# Altium PCB BTConnecter.PcbDoc
Units mil, origin at the board's own origin, x right, y up, seen from the top; angles counter-clockwise.
Board outline 1225 x 560 mil, 2 copper layers (Top Layer, Bottom Layer); 32 components, 19 nets, 120 pads, 51 vias.
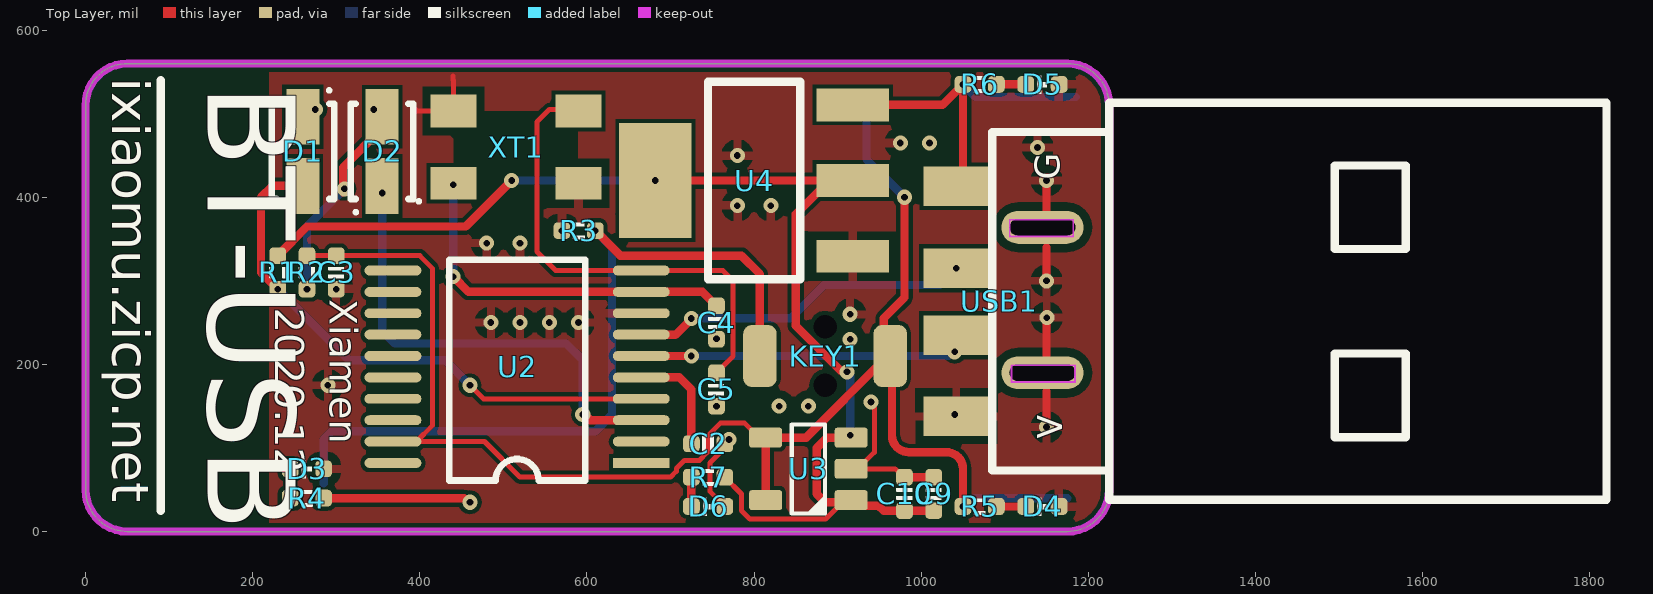
[diagram p0: Top Layer view]
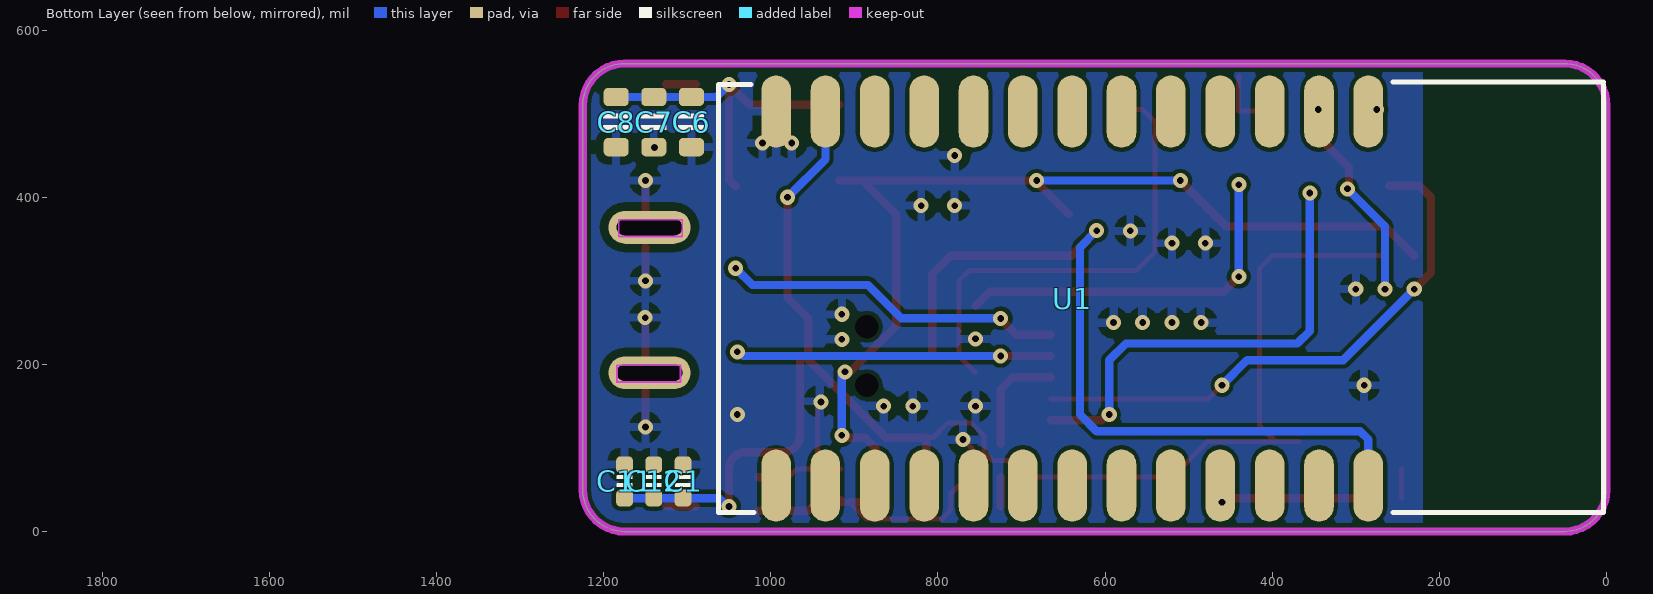
[diagram p1: Bottom Layer view, seen from below]
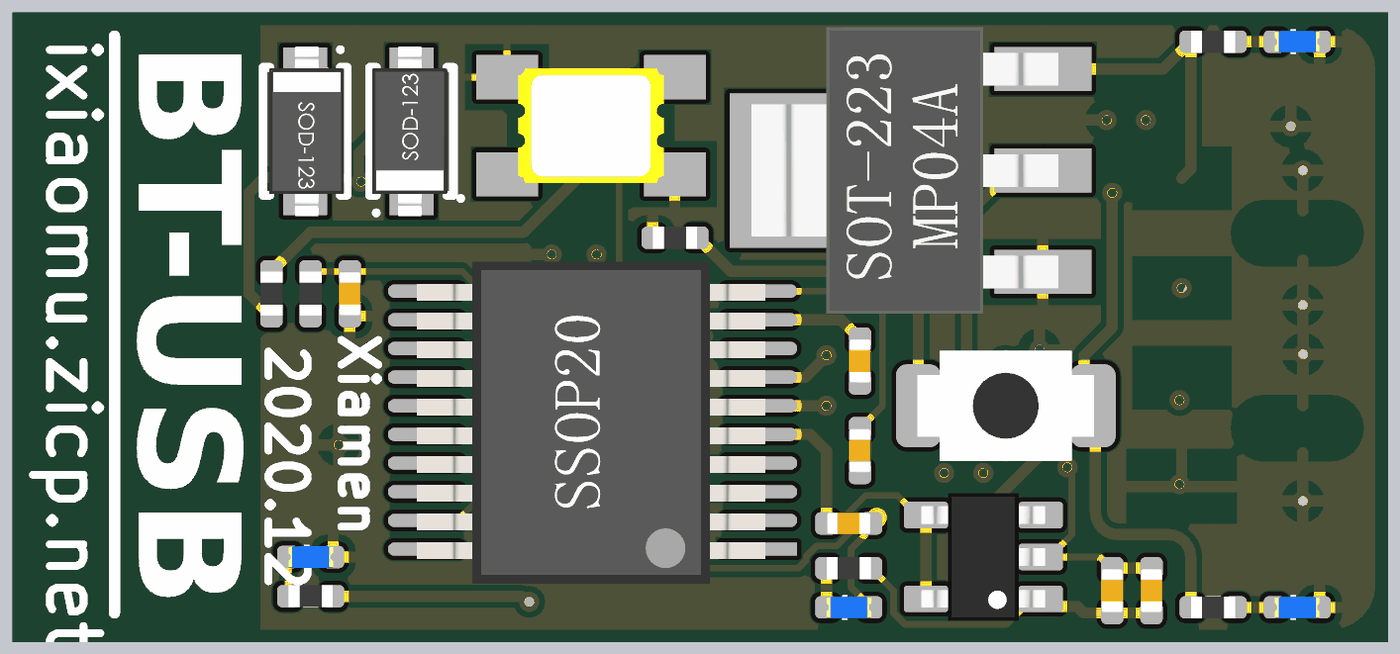
[diagram p2: 3D render of the assembled board from above, using the file's embedded part models]
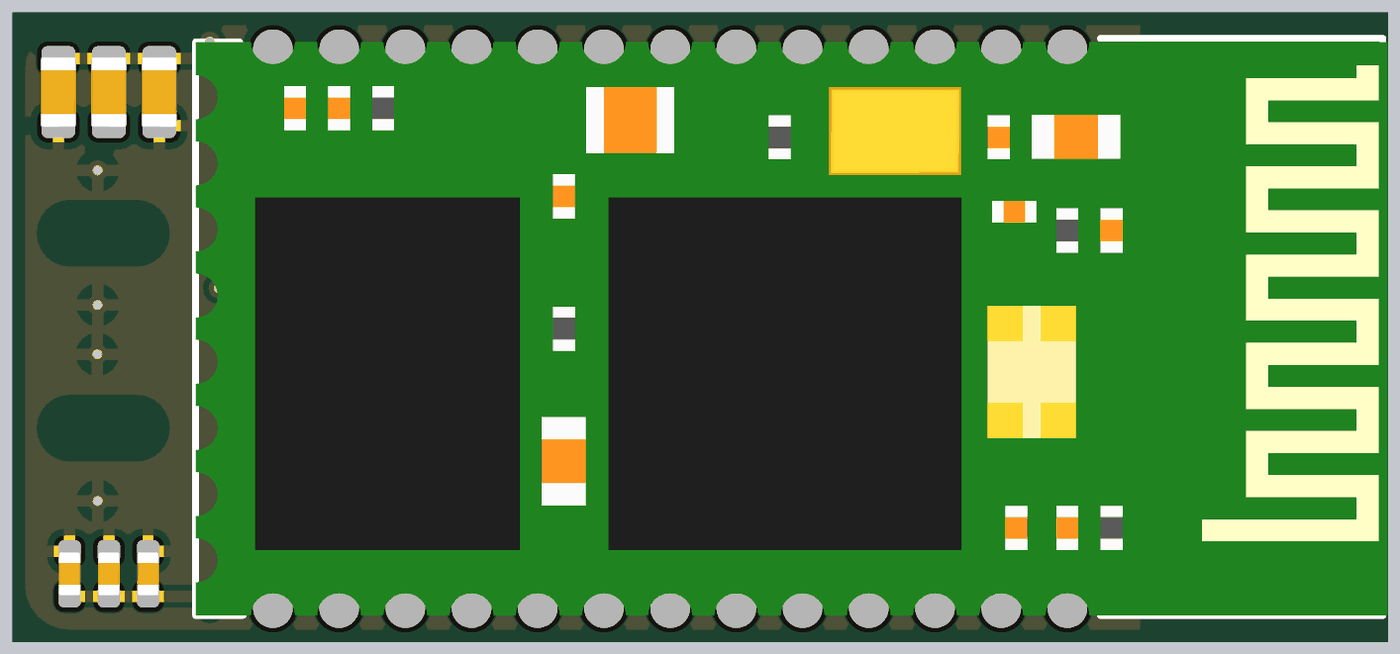
[diagram p3: 3D render of the assembled board from below, using the file's embedded part models]

## Layer stack, top to bottom
Top Solder: solder mask 0.4, Solder Resist, Dk 3.5
Top Layer: signal copper 1.4
Dielectric 1: dielectric 12.6, FR-4, Dk 4.8
Bottom Layer: signal copper 1.4
Bottom Solder: solder mask 0.4, Solder Resist, Dk 3.5

## Board outline
0,50 0,510 cw(c50,510) 50,560 1175,560 cw(c1175,510) 1225,510 1225,50 cw(c1175,50) 1175,0 50,0 cw(c50,50)

## Design rules (kind name [scope] priority, off if disabled: settings)
Clearance [All] p1: gap=5 ignorepadtopadclearanceinfootprint=FALSE
PolygonConnect [All] p1: connectstyle=Relief reliefconductorwidth=10 reliefentries=4 polygonreliefangle="90 Angle" airgapwidth=10
RoutingVias [All] p1: holewidth=28 width=50 viastyle="Through Hole" minholewidth=28 minwidth=50 maxholewidth=28 maxwidth=50
SolderMaskExpansion [All] p1: expansion=4 istentingtop=FALSE
Width [All] p1: maxlimit=25 minlimit=4 preferedwidth=6
30 further rules are at their usual default settings.

## Classes and differential pairs
component class BTConnecter: C1 C2 C3 C4 C5 C6 C7 C8 C9 C10 C11 C12 D1 D2 D3 D4 D5 D6 KEY1 R1 R2 R3 R4 R5 R6 R7 U2 U3 U4 USB1

## Components (designator, comment, footprint, x,y, rotation, side; value= is the part's Value field where it differs from the comment)
C1 "2.2uF" CAP_0402 1105,60 r270 bottom value=0.1u
C2 "0.1uF" CAP_0402 745,105 r180 top value=0.1u
C3 "0.1uF" CAP_0402 300,310 r90 top value=0.1u
C4 "22pF" CAP_0402 755,250 r90 top value=0.1u
C5 "22pF" CAP_0402 755,170 r90 top value=0.1u
C6 "2.2uF" CAP_0603 1095,490 r90 bottom value=0.1u
C7 "2.2uF" CAP_0603 1140,490 r90 bottom value=0.1u
C8 "2.2uF" CAP_0603 1185,490 r270 bottom value=0.1u
C9 "0.1uF" CAP_0402 1015,45 r270 top value=0.1u
C10 "0.1uF" CAP_0402 980,45 r270 top value=0.1u
C11 "0.1uF" CAP_0402 1175,60 r270 bottom value=0.1u
C12 "0.1uF" CAP_0402 1140,60 r270 bottom value=0.1u
D1 "MBR140SFT1G" DIOM2717X10N 260,455 r270 top
D2 "MBR140SFT1G" DIOM2717X10N 355,455 r90 top
D3 "color?" LED_0402 265,75 r0 top
D4 "color?" LED_0402 1145,30 r0 top
D5 "color?" LED_0402 1145,535 r0 top
D6 "color?" LED_0402 745,30 r0 top
KEY1 "SW-PB" ButtonTACT_3x4x2_180H 885,210 r0 top
R1 "10K" RES_0402 230,310 r90 top value=22R
R2 "10K" RES_0402 265,310 r90 top value=22R
R3 "10K" RES_0402 590,360 r0 top value=22R
R4 "10K" RES_0402 265,40 r0 top value=22R
R5 "1K" RES_0402 1070,30 r180 top value=22R
R6 "3K" RES_0402 1070,535 r180 top value=22R
R7 "1K" RES_0402 745,65 r0 top value=22R
U1 "HC-05" HC-05/06/08V15 639.33,278.78 r180 bottom
U2 "CH340T" SSOP-20 670,82.05 r180 top
U3 "3.3V" SOT23-5 865,75 r180 top
U4 "AMS1117-GND" SOT223_JX 800,420 r0 top
USB1 "USB" USB-plug1 1820,38 r180 top
XT1 "8 MHz" DFN220P320X110-4N 515,460 r0 top

## Footprints (in the part's own frame and the unit in brackets; to place one, negate y for a bottom-side part, rotate by r counter-clockwise, add the part's x,y. Pads: shape width x height; smd on the part's side, far side on the other; paste and mask are expansions set on the pad)
ButtonTACT_3x4x2_180H [mil]
  round 0 hole 28: 0(0,-35) 0(0,35)
  rrect50% 40x74 smd: 1(-78,0) 2(78,0)
  body extent -79,-49 79,49, height 63
CAP_0402 [mil]
  rrect50% 20x20 smd: 1(-20,0) 2(20,0)
  silkscreen extent -7,-9 7,9, body extent -20,-10 20,10, height 20
CAP_0603 [mil]
  rrect50% 22x30 smd: 1(-30,0) 2(30,0)
  silkscreen extent -10,-15 10,15, body extent -31,-16 31,16, height 31
DFN220P320X110-4N [mm] "DFN, 4-Leads, Body 5.00x3.20mm, Pitch 2.20mm, IPC Medium Density"
  rect 1.4x1 smd: 1(-1.9,-1.1) 3(1.9,1.1) G(-1.9,1.1) G(1.9,-1.1)
  silkscreen extent -3,-1.7 -2.9,-1.6, body extent -1.65,-1.3 1.65,1.3, height 1.1
DIOM2717X10N [mm] "Molded Diode, 2-Leads, Body 2.70x1.65mm, IPC Medium Density"
  rect 1.7x1 smd: A(1.05,0) K(-1.05,0)
  silkscreen extent -1.9,-0.95 1.45,0.95, body extent -1.93,-0.81 1.93,0.89, height 1.43
HC-05/06/08V15 [mm]
  oval 0.9x2.2 smd: 1(9,5.684) 2(7.5,5.684) 3(6,5.684) 4(4.5,5.684) 5(3,5.684) 6(1.5,5.684) 7(0,5.684) 8(-1.5,5.684) 9(-3,5.684) 10(-4.5,5.684) 11(-6,5.684) 12(-7.5,5.684) 13(-9,5.684) 22(-9,-5.684) 23(-7.5,-5.684) 24(-6,-5.684) 25(-4.5,-5.684) 26(-3,-5.684) 27(-1.5,-5.684) 28(0,-5.684) 29(1.5,-5.684) 30(3,-5.684) 31(4.5,-5.684) 32(6,-5.684) 33(7.5,-5.684) 34(9,-5.684)
  silkscreen extent -10.75,-6.5 16.15,6.58, body extent -10.75,-6.5 16.25,6.5, height 4.31
LED_0402 [mil]
  rrect50% 20x20 smd: 1(-20,0) 2(20,0)
  silkscreen extent -6,-10 6,10, body extent -20,-10 20,10, height 18
RES_0402 [mil]
  rrect50% 20x20 smd: 1(-20,0) 2(20,0)
  silkscreen extent -7,-10 7,10, body extent -20,-10 20,10, height 14
SOT23-5 [mm]
  round 0.5 on Mech15: 0(0,0)
  rrect25% 1x0.6 smd: 1(-1.3,0.95) 2(-1.3,0) 3(-1.3,-0.95) 4(1.3,-0.95) 5(1.3,0.95)
  silkscreen extent -0.51,-1.35 0.51,1.35, body extent -1.4,-1.45 1.4,1.45, height 1.44
SOT223_JX [mm]
  rect 2.2x1 smd: 1(3,-2.3) 2(3,0) 3(3,2.3)
  rect 2.2x3.5 smd: 2(-3,0)
  silkscreen extent -1.4,-3 1.4,3, body extent -3.61,-3.25 3.35,3.25, height 1.7
SSOP-20 [mm]
  rect 1.727x0.3 smd: 1(0.127,0)
  oval 1.727x0.3 smd: 2(0.127,-0.65) 3(0.127,-1.3) 4(0.127,-1.95) 5(0.127,-2.6) 6(0.127,-3.25) 7(0.127,-3.9) 8(0.127,-4.55) 9(0.127,-5.2) 10(0.127,-5.85) 11(7.673,-5.85) 12(7.673,-5.2) 13(7.673,-4.55) 14(7.673,-3.9) 15(7.673,-3.25) 16(7.673,-2.6) 17(7.673,-1.95) 18(7.673,-1.3) 19(7.673,-0.65) 20(7.673,0)
  silkscreen extent 1.84,-6.18 5.96,0.53, body extent -0.01,-6.52 7.89,0.78, height 1.79
USB-plug1 [mm]
  rect 2x1.2 smd: 1(19.761,-9.525) 2(19.761,-7.036) 3(19.761,-5.004) 4(19.761,-2.54)
  oval 2.5x1 hole 0.5 slot 2 at 0 deg: 4(17.145,-8.28) 4(17.145,-3.861)
  Keep-Out Layer lines w0.051: 18.136,-8.001 17.983,-8.001 16.434,-8.001 16.205,-8.001 16.205,-8.509 18.136,-8.509 18.136,-8.001 ; 18.085,-3.581 18.085,-4.089 16.154,-4.089 16.154,-3.581 16.383,-3.581 17.932,-3.581 18.085,-3.581
  silkscreen extent 0,-12.06 18.67,0, body extent 0.21,-12.08 20.21,-0.08, height 2.22

## Part data
C1 C2 C3 C4 C5 C9 C10 C11 C12: library part 电容-0402, "Capacitor"
C6 C7 C8: library part 电容-0603, "Capacitor"
D1 D2: "Rectifier Diode, Single, 40 V, 1 A, SOD-123FL, 2, 550 mV"
D3 D4 D5 D6: library part LED_0402, "LED", Type=0402
KEY1: library part KEY
R1 R2 R3 R4 R5 R6 R7: library part 电阻-0402, "Resistor"
U1: library part 蓝牙hc05
U2: "Port"
U3: library part LP5907MFX-3.3/NOPB, "IC REG LDO 3.3V 0.25A SOT23-5", Current - Limit (Min)=-, Current - Output=250mA, Manufacturer="Texas Instruments", Operating Temperature="-40°C ~ 125°C", Package / Case="SC-74A, SOT-753", Supplier Device Package=SOT-23, Supplier Part Number 1=296-38557-1-ND, Voltage - Input="Up to 5.5V", Category="Integrated Circuits (ICs)", ComponentLink1Description=http://www.ti.com/lit/ds/symlink/lp5907.pdf, ComponentLink1URL=http://www.ti.com/lit/ds/symlink/lp5907.pdf, Mounting Type="Surface Mount", Packaging="Cut Tape (CT)", Part Status=Active, Pricing 1="1=0.57, 10=0.487, 100=0.3634, 500=0.28552, 1000=0.22063 (USD)", Regulator Topology="Positive Fixed", RoHS="RoHS Compliant", Stock 1=39845, Supplier 1=Digi-Key, Voltage - Dropout (Typical)=-, Voltage - Output=3.3V
U4: "IC"
USB1: library part USB公头
XT1: library part ABM3B-8.000MHZ-10-1-U-T, "Crystal 8MHz ±10ppm 10pF 200 Ohm -10°C ~ 60°C Surface Mount 4-SMD, No Lead (DFN, LCC)", Frequency Stability=±10ppm, Load Capacitance=10pF, Manufacturer="Abracon LLC", Operating Mode=Fundamental, Operating Temperature="-10°C ~ 60°C", Package / Case="4-SMD, No Lead", Ratings=-, Supplier Part Number 1=535-9721-1-ND, Category="Crystals, Oscillators, Resonators", ComponentLink1Description=http://www.abracon.com/Resonators/abm3b.pdf, ComponentLink1URL=http://www.abracon.com/Resonators/abm3b.pdf, Frequency Tolerance=±10ppm, Height - Seated (Max)="0.043\" (1.10mm)", Manufacturer Part Number=ABM3B-8.000MHZ-10-1-U-T, Mounting Type="Surface Mount", Packaging="Cut Tape (CT)", Part Status=Active, Pricing 1="1=0.69, 10=0.578, 50=0.5198, 100=0.462, 500=0.4389 (USD)", Pricing 2="1000=0.336, 3000=0.315, 5000=0.3045, 10000=0.294 (USD)", RoHS="RoHS Compliant", Size / Dimension="0.197\" L x 0.126\" W (5.00mm x 3.20mm)", Stock=35437, Supplier 1=Digi-Key, Supplier 2=Digi-Key, Supplier Part Number 2=535-9721-2-ND, Type="MHz Crystal"

## Via types
v1: diameter 18, hole 8, Top Layer to Bottom Layer, tented both sides, 51 vias

## Nets (pads, with @x,y where several pads share a name; then routed paths per layer and width w, separated by ;. In a path a pad name is that pad's centre, name@x,y a point inside that pad or via, vN(x,y) a via of type N, cw(c..) or ccw(c..) an arc to the next point about the centre after c; other vN are vias at no path point)
3.3V: C1.2 C3.2 C11.2 C12.2 KEY1.2 R2.2 R5.2 U1.12 U2.19 U3.4 U3.5 | length 1844.2
  Top Layer w6: R2.2 C3.2 400,330 415,315 415,126.63 U2.19@396.01,107.64 ; U2.19 U2.19@396.01,107.64 ; U3.4 805.94,112.4 788.35,130 760,130 745,115 745,110 744.72,109.72 744.72,95.28 734.44,85 716.62,85 707,75.38 707,72 700,65 520,65 477.36,107.64 U2.19@396.01,107.64
  Top Layer w10: U3.5 U3.4 862.4,112.4 955,205 955,255 980,280 v1(980,400) ; KEY1.2 cw(c963,208) 965,208 965,115 ccw(c985,115) 985,95 1030,95 cw(c1030,75) 1050,75 v1(1050,30)
  Bottom Layer w10: U1.12@934.61,505 U1.12 934.61,445.39 v1(980,400) ; v1(1050,30) 1052.16,30 1062.16,40 C1.2 C12.2 C11.2
GND: C1.1 C2.1 C3.1 C4.1 C5.1 C6.1 C7.1 C8.2 C9.1 C10.1 C11.1 C12.1 D3.2 D4.2 D5.2 D6.2 R3.1 U1.13 U2.8 U3.2 U4.1 USB1.4 XT1.G | length 537.5
  Top Layer w6: 395,505 396.69,503.31 440.2,503.31 440.2,539.8 440,540 440,545 ; D6.2 747,48 747,82 759.23,94.23 759.23,99.23 C2.1 ; U3.2 U3.2@924.06,75 ; v1(940,155) 940,151.75 943.87,147.89 943.87,94.81 U3.2@924.06,75 ; C10.1 978.92,65 968.92,75 U3.2@924.06,75
  Top Layer w10: C10.1 C9.1 ; v1(1150,125) 1150,168 ; 1150,210 1150,255.61 v1(1150.29,255.9) v1@1150.29,253.73 ; v1(1150,300) 1150,340 ; 1150,384 v1(1150,420)
  other v1: 770,110 1040,140 755,150 830,150 865,150 290,175 915,230 755.1,230.59 485,250 520,250 555,250 590,250 915,260 300,290 480,345 520,345 569.79,359.8 780,390 820,390 780,450 1139.23,459.46 975,465 1010,465
NetC2_2: C2.2 U2.5 | length 131
  Top Layer w10: U2.5 710.59,184.41 725,170 C2.2
NetC4_2: C4.2 U2.9 XT1.1 | length 439.5
  Top Layer w10: v1(440,305) 458.23,286.77 U2.9 738.23,286.77 C4.2
  Bottom Layer w10: v1(440,305) v1(440,415)
NetC5_2: C5.2 U2.10 XT1.3 | length 579.5
  Top Layer w6: XT1.3 588.11,505 555,505 540,490 540,335 562.64,312.36 U2.10 762.64,312.36 775,300 775,210 C5.2
NetD1_K: D1.K U1.1
  other v1: 275,505
NetD2_A: D2.A R2.1 U1.2 | length 248.3
  Top Layer w10: v1@308.09,406.06 308.09,435.65 355,482.56 D2.A
  Bottom Layer w10: v1(265,290) 265,365 v1(310,410)
  other v1: 345,505
NetD3_1: D3.1 R4.1 | length 35
  Top Layer w6: R4.1 D3.1
NetD4_1: D4.1 R5.1 | length 35
  Top Layer w10: R5.1 D4.1
NetD5_1: D5.1 R6.1 | length 35
  Top Layer w10: R6.1 D5.1
NetD6_1: D6.1 R7.1 | length 35
  Top Layer w10: D6.1 R7.1
NetKEY1_1: KEY1.1 R3.2 U1.34 | length 954.8
  Top Layer w10: v1(610,360) 640,330 785,330 807,308 KEY1.1
  Bottom Layer w10: U1.34@285,57.44 285,110 295,120 610,120 630,140 630,340 v1(610,360)
NetR4_2: R4.2 U1.31 | length 177.1
  Top Layer w10: R4.2 452.84,40 457.84,35 v1(460,35)
USART_RX: D2.K U2.3 | length 557.3
  Top Layer w10: v1(595,140) 597.16,140 603.94,133.23 U2.3
  Bottom Layer w10: v1(355,405) 355,240 370,225 575,225 595,205 v1(595,140)
USART_TX: D1.A R1.1 U2.4 | length 663.3
  Top Layer w6: v1(460,175) 476.18,158.82 U2.4
  Top Layer w10: v1(230,290) 210,310 210,400 223.66,413.66 D1.A
  Bottom Layer w10: v1(230,290) 315,205 430,205 v1(460,175)
USB_5V: C6.2 C7.2 C8.1 R6.2 U4.3 USB1.1 | length 408.5
  Top Layer w10: U4.3 1025.54,510.54 v1(1050,535) 1050,421 USB1.1
  Bottom Layer w10: v1(1050,535) 1065,520 C6.2 C7.2 C8.1
USB_D+: U2.6 USB1.3 | length 377.1
  Top Layer w10: U2.6 v1(725,210)
  Bottom Layer w10: v1(725,210) 1032.84,210 1037.84,215 v1(1040,215)
USB_D-: U2.7 USB1.2 | length 410.5
  Top Layer w10: U2.7 665.35,235.24 705.86,235.24 725,254.39 v1(725,255)
  Bottom Layer w10: v1(725,255) 843.58,255 883.58,295 1022,295 v1(1042,315)
VCC: C9.2 C10.2 R1.2 R7.2 U3.1 U3.3 U4.2 | length 1566.6
  Top Layer w6: R7.2 785,45 785,25 795,15 885.71,15 905.71,35 U3.1@913.58,35
  Top Layer w10: R1.2 265,365 455,365 v1(510,420) ; U4.2@643.58,380 681.89,418.31 v1(681.89,420) U4.2@890,420 ; U3.1@905.71,35 885,35 875,45 875,100 887.35,112.35 916.13,112.35 U3.3 ; v1(911.25,191) 909.72,192.53 903.53,192.53 850,246.06 850,380 U4.2@890,420 ; U3.1@913.58,35 U3.1 922.99,30.79 949.21,30.79 955,25 C10.2 C9.2 ; U4.2@918.1,420 U4.2@890,420
  Bottom Layer w10: v1(510,420) v1(681.89,420) ; v1(911.25,191) 915,187.25 v1(915,115)
pads on no net: KEY1.0 U1.3 U1.4 U1.5 U1.6 U1.7 U1.8 U1.9 U1.10 U1.11 U1.22 U1.23 U1.24 U1.25 U1.26 U1.27 U1.28 U1.29 U1.30 U1.32 U1.33 U2.1 U2.2 U2.11 U2.12 U2.13 U2.14 U2.15 U2.16 U2.17 U2.18 U2.20 U3.0

## Polygon pours and split planes (outlines as drawn)
GND on Bottom Layer "GND_L02_P005" (solid, pour order 5): 0,50 ccw(c50,50) 50,0 1175,0 ccw(c1175,50) 1225,50 1225,510 ccw(c1175,510) 1175,560 50,560 ccw(c50,510) 0,510
GND on Bottom Layer "GND_L02_P000" (solid, pour order 0): 0,50 ccw(c50,50) 50,0 1175,0 ccw(c1175,50) 1225,50 1225,510 ccw(c1175,510) 1175,560 50,560 ccw(c50,510) 0,510
GND on Top Layer "GND_L01_P004" (solid, pour order 4): 0,50 ccw(c50,50) 50,0 1175,0 ccw(c1175,50) 1225,50 1225,510 ccw(c1175,510) 1175,560 50,560 ccw(c50,510) 0,510

## Keep-outs
Keep-Out Layer:
  the board outline again, w10

## Silkscreen, mask and mechanical layers (free items; w line width, h text height)
Top Overlay:
  lines w10: 90,25 90,540
  text "ixiaomu.zicp.net" at 32,543 h45 r270
  text "BT-USB" at 111.67,535 h180 r270
  text "Xiamen" at 292,278 h33 r270
  text "2020.12" at 227,268 h35 r270
Mechanical 1:
  lines w10: -5,50 cw(c0,50) -5,50.03 ; -5,50 ccw(c50,50) 49.97,-5 ; -5,50 -5,50.03 ; -5,50.03 -5,510 ; -5,510 cw(c50,510) 49.97,565 ; -5,510 -5,510 ; 49.97,-5 ccw(c50,0) 50,-5 ; 49.97,-5 ccw(c50,0) 50,-5 ; 49.97,-5 ccw(c50,50) 50,-5 ; 49.97,565 cw(c50,560) 50,565 ; 49.97,565 cw(c50,560) 50,565 ; 49.97,565 cw(c50,510) 50,565 ; 50,-5 ccw(c50,0) 50,-5 ; 50,-5 1175,-5 ccw(c1175,50) 1230,49.97 ; 50,565 1175,565 ; 1175,565 cw(c1175,510) 1230,510 1230,50 ; 1175,565 1175,565 ; 1230,49.97 ccw(c1225,50) 1230,50 ; 1230,49.97 ccw(c1225,50) 1230,50 ; 1230,49.97 ccw(c1175,50) 1230,50 ; 1230,50 ccw(c1225,50) 1230,50

## Text inside footprints (layer, text, board x,y; h text height)
USB1: Top Overlay "V" at 1169,111 h30 r90; Top Overlay "G" at 1166,421 h30 r90